# Altium PCB LT4320.PcbDoc
Units mil, origin at the board's own origin, x right, y up, seen from the top; angles counter-clockwise.
Board outline 1510.03 x 1347.03 mil, 2 copper layers (Top Layer, Bottom Layer); 13 components, 8 nets, 49 pads, 0 vias.
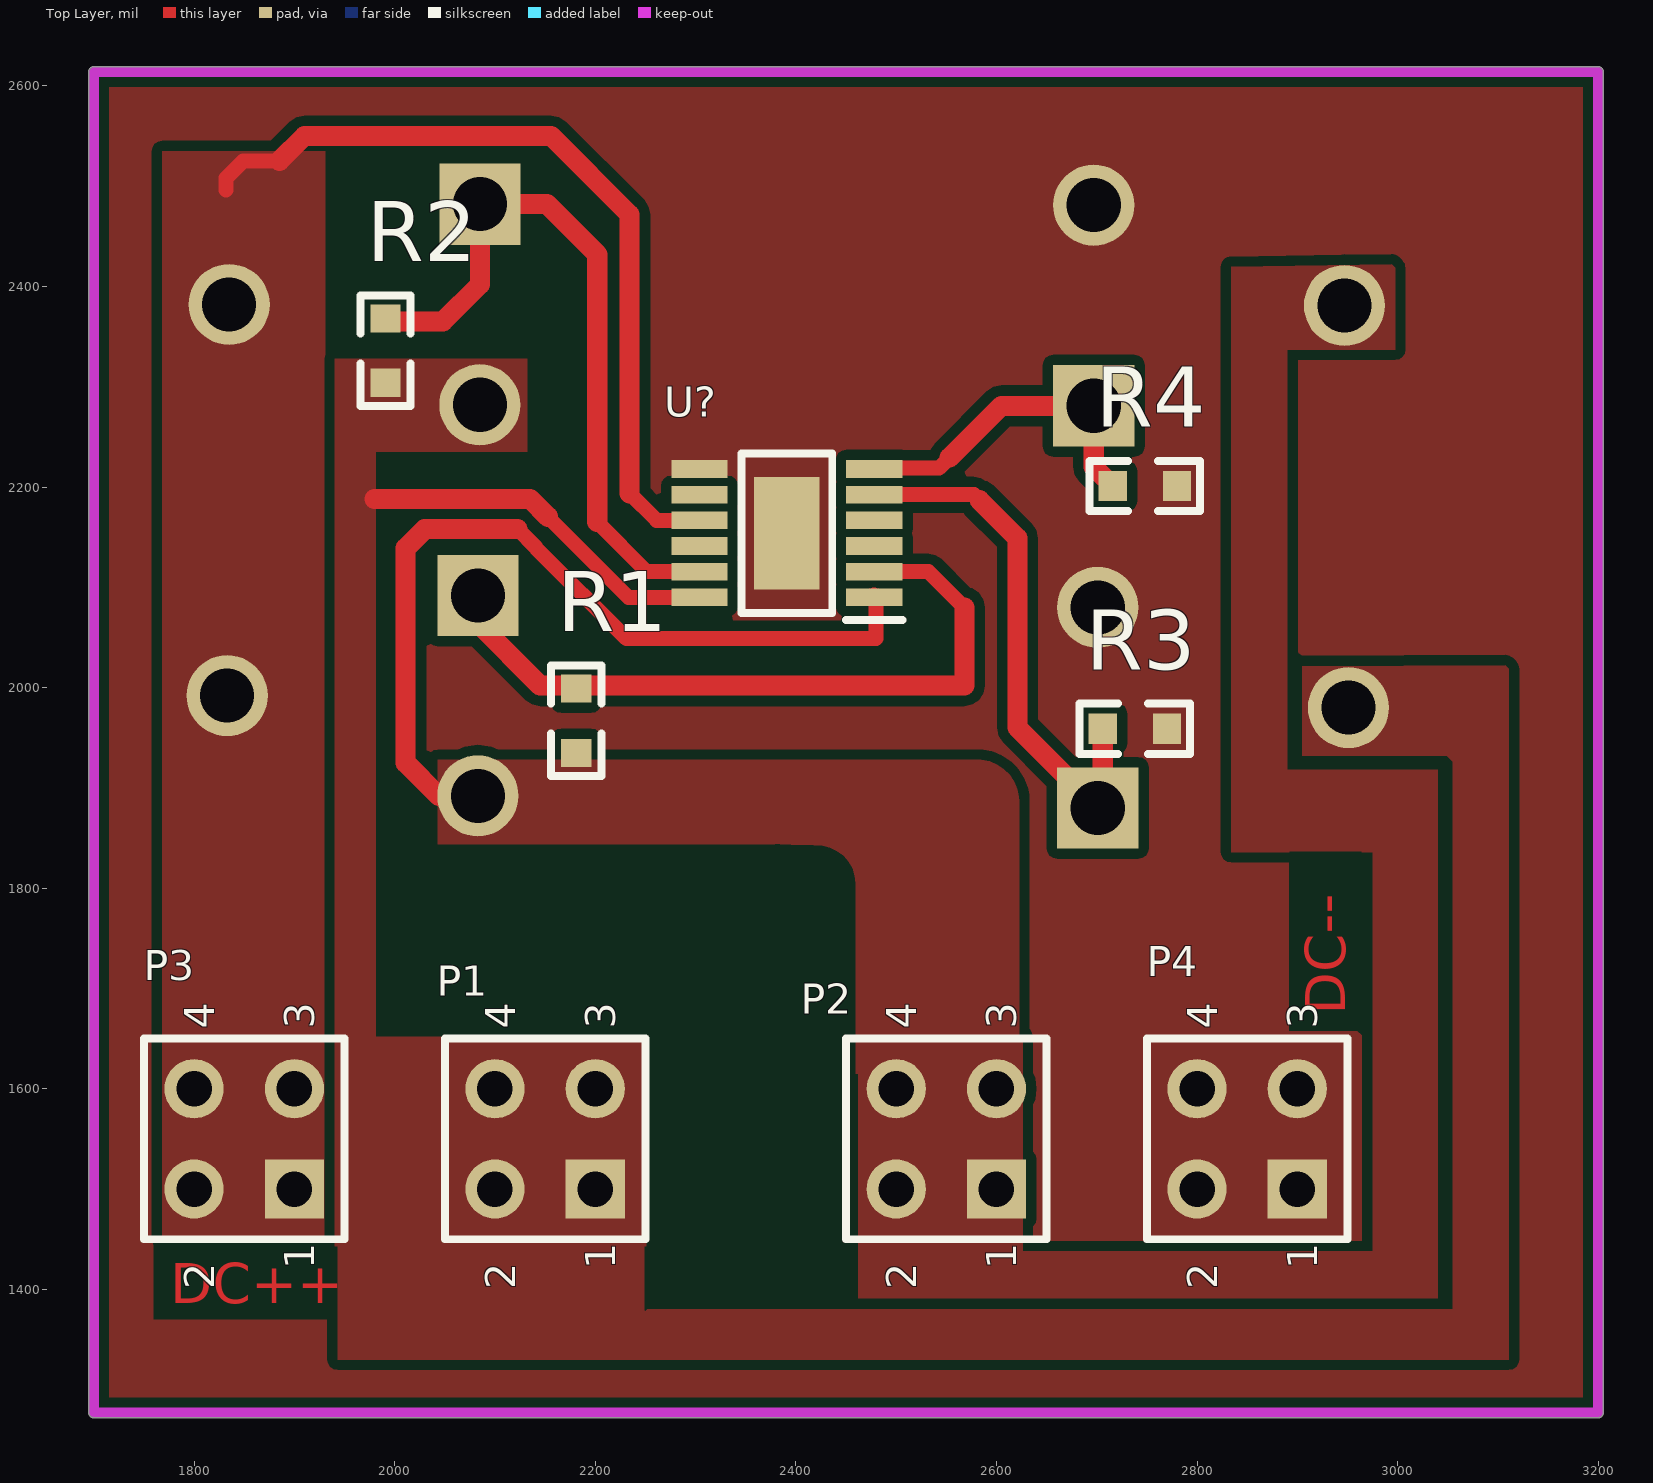
[diagram p0: Top Layer view]
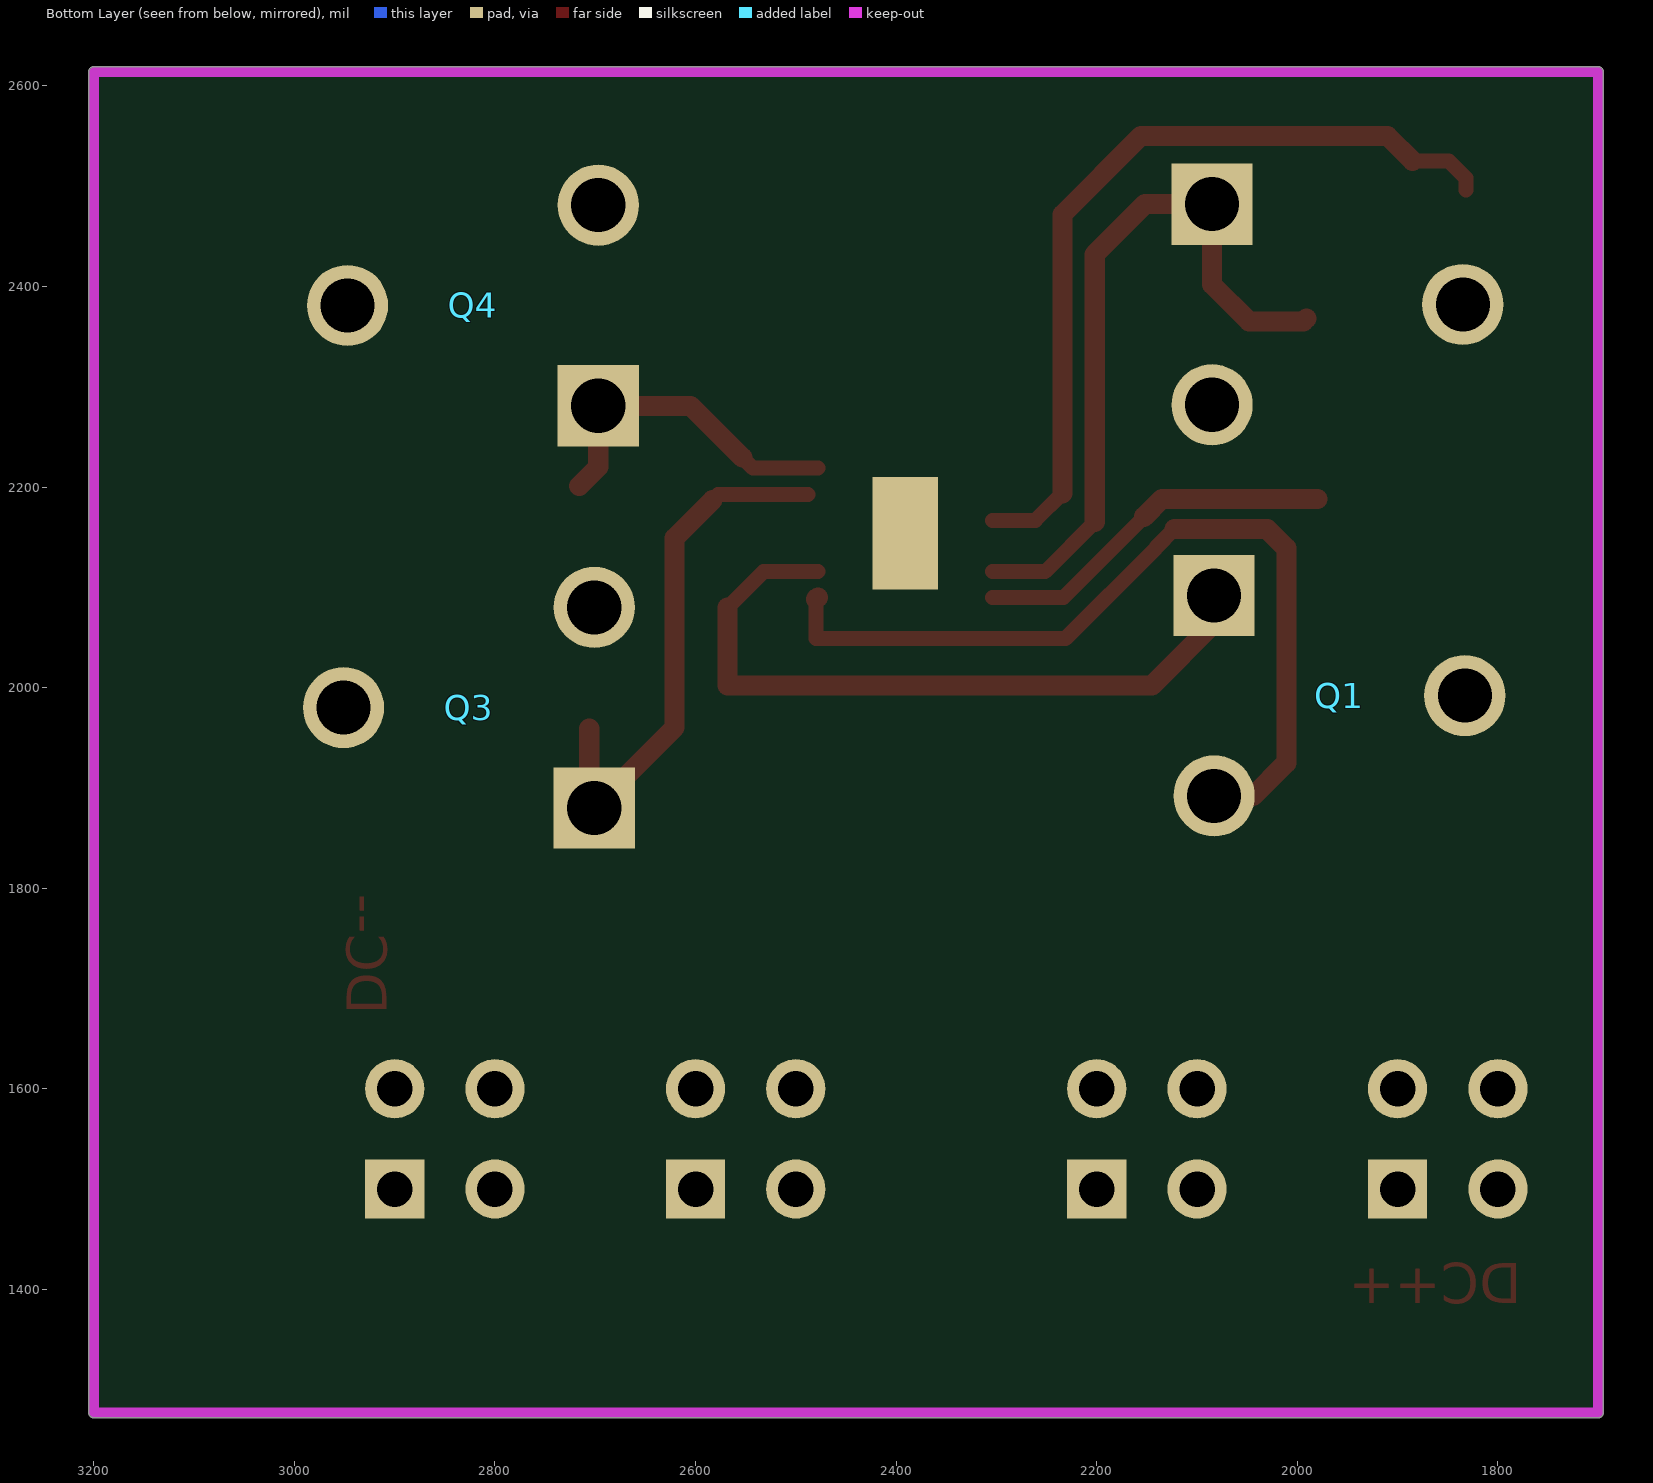
[diagram p1: Bottom Layer view, seen from below]

## Layer stack, top to bottom
Top Solder: solder mask 0.4, Solder Resist, Dk 3.5
Top Layer: signal copper 1.4
Dielectric 1: dielectric 12.6, FR-4, Dk 4.8
Bottom Layer: signal copper 1.4
Bottom Solder: solder mask 0.4, Solder Resist, Dk 3.5

## Board outline
1694.98,1277 ccw(c1700,1277) 1700,1271.98 3200,1271.98 ccw(c3200,1277) 3205.01,1277 3205.01,2614 ccw(c3200,2614) 3200,2619.01 1700,2619.01 ccw(c1700,2614) 1694.98,2614

## Design rules (kind name [scope] priority, off if disabled: settings)
Clearance [All] p1: gap=10 ignorepadtopadclearanceinfootprint=FALSE
ComponentClearance [All] p1: gap=0 collisioncheckmode=3 verticalgap=0 showdistances=FALSE
HoleToHoleClearance [All] p1: gap=0 allowstackedmicrovias=TRUE
MinimumSolderMaskSliver [All] p1: minsoldermaskwidth=0
PlaneConnect [All] p1: planeconnectstyle=Direct reliefexpansion=20 reliefentries=4 reliefconductorwidth=10 reliefairgap=10
PolygonConnect [All] p1: connectstyle=Direct reliefconductorwidth=10 reliefentries=4 polygonreliefangle="90 Angle" airgapwidth=10
RoomDefinition LT4320 [InComponentClass('LT4320')] p1: confinementstyle=ConfineIn formatcopy=TRUE lockcomponents=FALSE outline 217.91,611.02 8542.91,611.02 8542.91,7846.02 217.91,7846.02
RoutingVias [All] p1: holewidth=28 width=50 viastyle="Through Hole" minholewidth=28 minwidth=50 maxholewidth=28 maxwidth=50
SilkToSilkClearance [All] p1: silktosilkclearance=0
SilkToSolderMaskClearance [IsPad] p1: minsilkscreentomaskgap=0 clearancetoexposedcopper=TRUE
SolderMaskExpansion [All] p1: expansion=4
Width [All] p1: maxlimit=40 minlimit=10 preferedwidth=30 minimp=50.000000 maximp=50.000000 favimp=50.000000
24 further rules are at their usual default settings.

## Components (designator, comment, footprint, x,y, rotation, side; value= is the part's Value field where it differs from the comment)
P1 "Header 2X2" HDR2X2 2200,1500 r90 top
P2 "Header 2X2" HDR2X2 2600,1500 r90 top
P3 "Header 2X2" HDR2X2 1900,1500 r90 top locked
P4 "Header 2X2" HDR2X2 2900,1500 r90 top
Q1 "IRF540NLPBF" TO254P483X1016X1501-3P 2083,2092 r270 bottom
Q2 "IRF540NLPBF" TO254P483X1016X1501-3P 2085,2482 r270 bottom
Q3 "IRF540NLPBF" TO254P483X1016X1501-3P 2701,1880 r90 bottom
Q4 "IRF540NLPBF" TO254P483X1016X1501-3P 2697,2281 r90 bottom
R1 "Res" 0603r 2181,1967 r270 top value=1K
R2 "Res" 0603r 1991,2336 r270 top value=1K
R3 "Res" 0603r 2738,1959 r0 top value=1K
R4 "Res" 0603r 2748,2201 r0 top value=1K
U? "LT4320IMSE-1#PBF" SOP65P490X110-12N 2391,2154 r180 top

## Footprints (in the part's own frame and the unit in brackets; to place one, negate y for a bottom-side part, rotate by r counter-clockwise, add the part's x,y. Pads: shape width x height; smd on the part's side, far side on the other; paste and mask are expansions set on the pad)
0603r [mil]
  rect 28x30 smd: 1(-32,0) 2(32,0)
  silkscreen extent -55,-25 55,25
HDR2X2 [mm] "Connector; Header; 2x2 Position"
  rect 1.5x1.5 hole 0.9: 1(0,0)
  round 1.5 hole 0.9: 2(0,2.54) 3(2.54,0) 4(2.54,2.54)
  silkscreen extent -1.27,-1.27 3.81,3.81
SOP65P490X110-12N [mm]
  rect 1.425x0.45 smd: 1(-2.212,1.625) 2(-2.212,0.975) 3(-2.212,0.325) 4(-2.212,-0.325) 5(-2.212,-0.975) 6(-2.212,-1.625) 7(2.212,-1.625) 8(2.212,-0.975) 9(2.212,-0.325) 10(2.212,0.325) 11(2.212,0.975) 12(2.212,1.625)
  rect 1.651x2.854 all layers, no hole: 13(0,0)
  silkscreen extent -2.93,-2.02 1.15,2.2, body extent -2.45,-2.02 2.45,2.02, height 1.1
TO254P483X1016X1501-3P [mm]
  rect 2.055x2.055 hole 1.37: 1(0,0)
  round 2.055 hole 1.37: 2(2.54,6.35) 3(5.08,0)

## Part data
P1 P2 P3 P4: "Header, 2-Pin, Dual row", LatestRevisionDate=17-Jul-2002, LatestRevisionNote="Re-released for DXP Platform.", Publisher="Altium Limited"
Q1 Q2 Q3 Q4: "MOSFET (N-Channel)", Manufacturer_Name="International Rectifier", Mouser Part Number=942-IRF540NLPBF, Datasheet Link=https://www.infineon.com/dgdl/irf540nspbf.pdf?fileId=5546d462533600a4015355e3a72819a3, Height=4.83mm, Manufacturer_Part_Number=IRF540NLPBF, Mouser Price/Stock=http://www.mouser.com/Search/ProductDetail.aspx?qs=9%252bKlkBgLFf0FQw5bWQHS0A%3d%3d
R1 R2 R3 R4: "Resistor", LatestRevisionDate=17-Jul-2002, LatestRevisionNote="Re-released for DXP Platform.", PackageDescription="Axial Device, Thru-Hole; 2 Leads; 0.3 in Pin Spacing", PackageReference=AXIAL-0.3, Published=8-Jun-2000, Publisher="Altium Limited"
U?: "Undefined or Miscellaneous", Manufacturer_Name="Linear Technology", Mouser Part Number=584-LT4320IMSE-1#PBF, Datasheet Link=http://www.linear.com/docs/43273, Height=1.1mm, Manufacturer_Part_Number=LT4320IMSE-1#PBF

## Nets (pads, with @x,y where several pads share a name; then routed paths per layer and width w, separated by ;. In a path a pad name is that pad's centre, name@x,y a point inside that pad or via, vN(x,y) a via of type N, cw(c..) or ccw(c..) an arc to the next point about the centre after c; other vN are vias at no path point)
IN1: P1.1 P1.2 P1.3 P1.4 Q2.3 Q3.2 R2.2 U?.12 | length 364.5
  Top Layer w15: 2152.65,2170.35 2232.98,2090.02 U?.12
  Top Layer w20: 1980,2188 2135.08,2188 2152.65,2170.43 2152.65,2170.35
IN2: P2.1 P2.2 P2.3 P2.4 Q1.3 Q4.2 R1.2 U?.1 | length 863.9
  Top Layer w15: Q1.3@2044,1892 Q1.3 ; 2122.65,2158 2140.95,2139.7 2140.95,2139.05 2231,2049 2480,2049 U?.1@2480,2088.11
  Top Layer w20: Q1.3@2044,1892 2011,1925 2011,2139 2030,2158 2122.65,2158 ; U?.1 U?.1@2480,2088.11
NetQ1_1: Q1.1 R1.1 U?.2 | length 721.3
  Top Layer w15: Q1.1@2083,2064 Q1.1 ; U?.2 2532.39,2115.61 2568,2080
  Top Layer w20: Q1.1@2083,2064 2145,2002 2568,2002 2568,2080
NetQ2_1: Q2.1 R2.1 U?.11 | length 717.6
  Top Layer w15: 2202,2165 2251.39,2115.61 U?.11
  Top Layer w20: R2.1 1994,2365 2048,2365 2085,2402 Q2.1 2152,2482 2202,2432 2202,2165
NetQ3_1: Q3.1 R3.1 U?.5 | length 534.2
  Top Layer w15: U?.5@2488,2192.39 2577.61,2192.39 2583,2187
  Top Layer w20: 2583,2187 2621,2149 2621,1960 Q3.1 2706,1885 R3.1
NetQ4_1: Q4.1 R4.1 U?.6 | length 332.6
  Top Layer w15: U?.6@2478.09,2218.74 2542.74,2218.74 2553.23,2229.23
  Top Layer w20: 2553.23,2229.23 2605,2281 Q4.1 2697,2220 R4.1
OUTN: P4.1 P4.2 P4.3 P4.4 Q3.3 Q4.3 R3.2 R4.2 U?.7 U?.13
OUTP: P3.1 P3.2 P3.3 P3.4 Q1.2 Q2.2 U?.9 | length 822.9
  Top Layer w15: 1832,2496 1832,2508 1849,2525 1885,2525 ; 2234.2,2193.8 2261.2,2166.8 U?.9
  Top Layer w20: 1885,2525 1910,2550 2156,2550 2234.2,2471.8 2234.2,2193.8
pads on no net: U?.3 U?.4 U?.8 U?.10

## Polygon pours and split planes (outlines as drawn)
OUTN on Top Layer "Top Layer-No Net 1" (solid, remove dead copper, pour order 94): 3208,1273 3208,2606 3200,2614 1707,2614 1707,1284 1700,1277
IN2 on Top Layer "Top Layer-No Net 1" (solid, remove dead copper, pour order 82): 2043,1928 2581,1928 cw(c2581,1886.4) 2622.6,1886.4 2622.6,1615 2459.69,1615 2459.69,1801 ccw(c2421.25,1804.21) 2423.21,1842.73 cw(c2495.01,5108.46) 2379,1844 2043,1844
IN1 on Top Layer "Top Layer-No Net 1" (solid, remove dead copper, pour order 78): 2905,2021.51 2905,1932 3049,1932 3055,1926 3055,1910 3055,1380 2252,1380 2250,1378 2249,1379 2249,1644 1943,1644 1943,1330 3111,1330 3111,2022.49
OUTN on Top Layer "Top Layer-No Net 1" (solid, remove dead copper, pour order 76): 2649.49,2524 2791,2524 2819,2524 2819,1653 2957,1653 2957,1593 2957,1453 2757,1453 2757,2031 2651,2031 2651,2134 2762,2134 2762,2431 2647,2431
IN2 on Top Layer "Top Layer-No Net 1" (solid, remove dead copper, pour order 72): 2997.5,2422.2 2997.5,2337 2890,2337 2890,1918 3040,1918 3040,1391 2462,1391 2462,1652 2626,1652 2626,1438 2975,1438 2975,1836 2834,1836 2834,2419.64
IN1 on Top Layer "Top Layer-No Net 1" (solid, remove dead copper, pour order 64): 2251,1443 2251,1652 1981,1652 1981,2235 2132,2235 2132,2327.99 1940,2327.99 1940,1443
OUTP on Top Layer "Top Layer-No Net 1" (solid, remove dead copper, pour order 62): 1931,1452 1931,2535 1868,2535 1815,2535 1768,2535 1768,1452

## Keep-outs
Keep-Out Layer:
  lines w10: 1700,1277 1700,2614 3200,2614 3200,1277 1700,1277

## Other copper
Top Layer:
  text "DC--" at 2948,1674 h40 r90
  text "DC++" at 1776,1386 h40

## Text inside footprints (layer, text, board x,y; h text height)
P1: Top Overlay "1" at 2220,1420 h30 r90; Top Overlay "2" at 2120,1400 h30 r90; Top Overlay "4" at 2120,1660 h30 r90; Top Overlay "3" at 2220,1660 h30 r90
P2: Top Overlay "1" at 2620,1420 h30 r90; Top Overlay "2" at 2520,1400 h30 r90; Top Overlay "4" at 2520,1660 h30 r90; Top Overlay "3" at 2620,1660 h30 r90
P3: Top Overlay "1" at 1920,1420 h30 r90; Top Overlay "2" at 1820,1400 h30 r90; Top Overlay "4" at 1820,1660 h30 r90; Top Overlay "3" at 1920,1660 h30 r90
P4: Top Overlay "1" at 2920,1420 h30 r90; Top Overlay "2" at 2820,1400 h30 r90; Top Overlay "4" at 2820,1660 h30 r90; Top Overlay "3" at 2920,1660 h30 r90